# EAGLE board power_managment_board_v1 (EAGLE 9.2.2)

Size 160 x 100 mm. Coordinates in mm from the lower left corner, seen from the top.
Outline: 0,0 160,0 160,100 0,100 0,0
Copper layers (1*16): Top 0.035mm / dielectric 1.5mm / Bottom 0.035mm
Design rules "default": minimum track width 6mil, minimum drill 0.35mm, track to track 6mil, track to pad 6mil, pad to pad 6mil, via to via 6mil, smd to smd 6mil, copper to edge 40mil, drill to drill 6mil, minimum pad ring 10mil, minimum via ring 8mil, stop-mask expansion 4mil, vias tented up to drill 0mil, thermal gap 10mil

## Footprints (pad centres in the part's own frame; a part is rotated, then mirrored left to right if it is on the bottom)
0603SMT = smd 1.05 x 1.08: 1 -0.875,0; 2 0.875,0
SODFL3516X108N = smd 1.14 x 1.04: 1 -1.5,0; 2 1.5,0
SOT23-5 = smd 0.55 x 1.2: 1 -0.95,-1.3; 2 0,-1.3; 3 0.95,-1.3; 4 0.95,1.3; 5 -0.95,1.3
SOT23-6 = smd 0.6 x 0.9: 1 -0.95,-1.15; 2 0,-1.15; 3 0.95,-1.15; 4 0.95,1.15; 5 0,1.15; 6 -0.95,1.15

## Placement (x,y rotation side)
C1  2.2uF  [0603SMT]  2.54,-10.16 0 top  (outside the outline)
C2  4.7uF  [0603SMT]  2.54,-13.97 0 top  (outside the outline)
C3  160pF  [0603SMT]  2.54,-17.78 0 top  (outside the outline)
C4  2.2uF  [0603SMT]  5.08,-50.8 0 top  (outside the outline)
C5  4.7uF  [0603SMT]  10.16,-50.8 0 top  (outside the outline)
C6  160pF  [0603SMT]  -1.27,-50.8 0 top  (outside the outline)
C7  TBA (Probably OPEN)  [0603SMT]  -1.27,-81.28 0 top  (outside the outline)
C8  TBA  [0603SMT]  -1.27,-85.09 0 top  (outside the outline)
D1  CRS08(TE85L,Q,M)  [SODFL3516X108N]  5.08,-39.37 0 top  (outside the outline)
D2  CRS08(TE85L,Q,M)  [SODFL3516X108N]  5.08,-64.77 0 top  (outside the outline)
L1  10uH  [0603SMT]  2.54,-36.83 0 top  (outside the outline)
L2  10uH  [0603SMT]  3.81,-55.88 0 top  (outside the outline)
R1  124k  [0603SMT]  8.89,-55.88 0 top  (outside the outline)
R2  124k  [0603SMT]  2.54,-25.4 0 top  (outside the outline)
R3  13.3k  [0603SMT]  2.54,-29.21 0 top  (outside the outline)
R4  51k  [0603SMT]  2.54,-33.02 0 top  (outside the outline)
R5  13.3k  [0603SMT]  -1.27,-55.88 0 top  (outside the outline)
R6  51k  [0603SMT]  -1.27,-60.96 0 top  (outside the outline)
R7  100k  [0603SMT]  -1.27,-76.2 0 top  (outside the outline)
U$1  LMR64010SOT  [SOT23-5]  2.54,-3.81 0 top
U$2  LMR64010SOT  [SOT23-5]  0,-44.45 0 top  (outside the outline)
U$3  S-1011AA0SOT  [SOT23-6]  -1.27,-69.85 0 top  (outside the outline)

## Library data of the parts
C1-C8 L1 L2 R1-R7 U$1-U$3 = RobotRacing2019_Master
D1 D2 = SamacSys_Parts; DESCRIPTION: Schottky Rectifier 30V 1.5A 0.36V S-FLAT; HEIGHT: 1.08mm; MANUFACTURER_NAME: Toshiba; MANUFACTURER_PART_NUMBER: CRS08(TE85L,Q,M); MOUSER_PART_NUMBER: 757-CRS08TE85LQM

## Nets
GND: C1.2 C2.2 C4.2 C5.2 C7.2 C8.2 R3.2 R4.2 R5.2 R6.2 U$1.2 U$1.4 U$2.2 U$2.4 U$3.5
N$2: C2.1 C3.2 D1.1 R2.1
N$3: C3.1 R2.2 R3.1 U$1.3
N$4: D1.2 L1.2 U$1.1
N$6: C5.1 C6.2 D2.1 R1.1
N$7: C6.1 R1.2 R5.1 U$2.3
N$8: D2.2 L2.2 U$2.1
N$10: R7.1 U$3.3
N$12: C8.1 U$3.6
N$13: C7.1 U$3.4
VDD: C1.1 C4.1 L1.1 L2.1 R4.1 R6.1 R7.2 U$1.5 U$2.5 U$3.1

## Tracks (layer width: path | path; a pad name or v marks a point on that pad's centre or on a via)
GND  (14 unrouted)
N$2  (3 unrouted)
N$3  (3 unrouted)
N$4  (2 unrouted)
N$6  (3 unrouted)
N$7  (3 unrouted)
N$8  (2 unrouted)
N$10  (1 unrouted)
N$12  (1 unrouted)
N$13  (1 unrouted)
VDD  (9 unrouted)